# Altium PCB 795540071NUCLEO-DG_V3.PcbDoc (part 2 of 2)
Units mm, origin at the board's own origin, x right, y up, seen from the top; angles counter-clockwise.
Board outline 74.51 x 73.97 mm, 2 copper layers (Top Layer, Bottom Layer); 62 components, 85 nets, 350 pads, 246 vias.
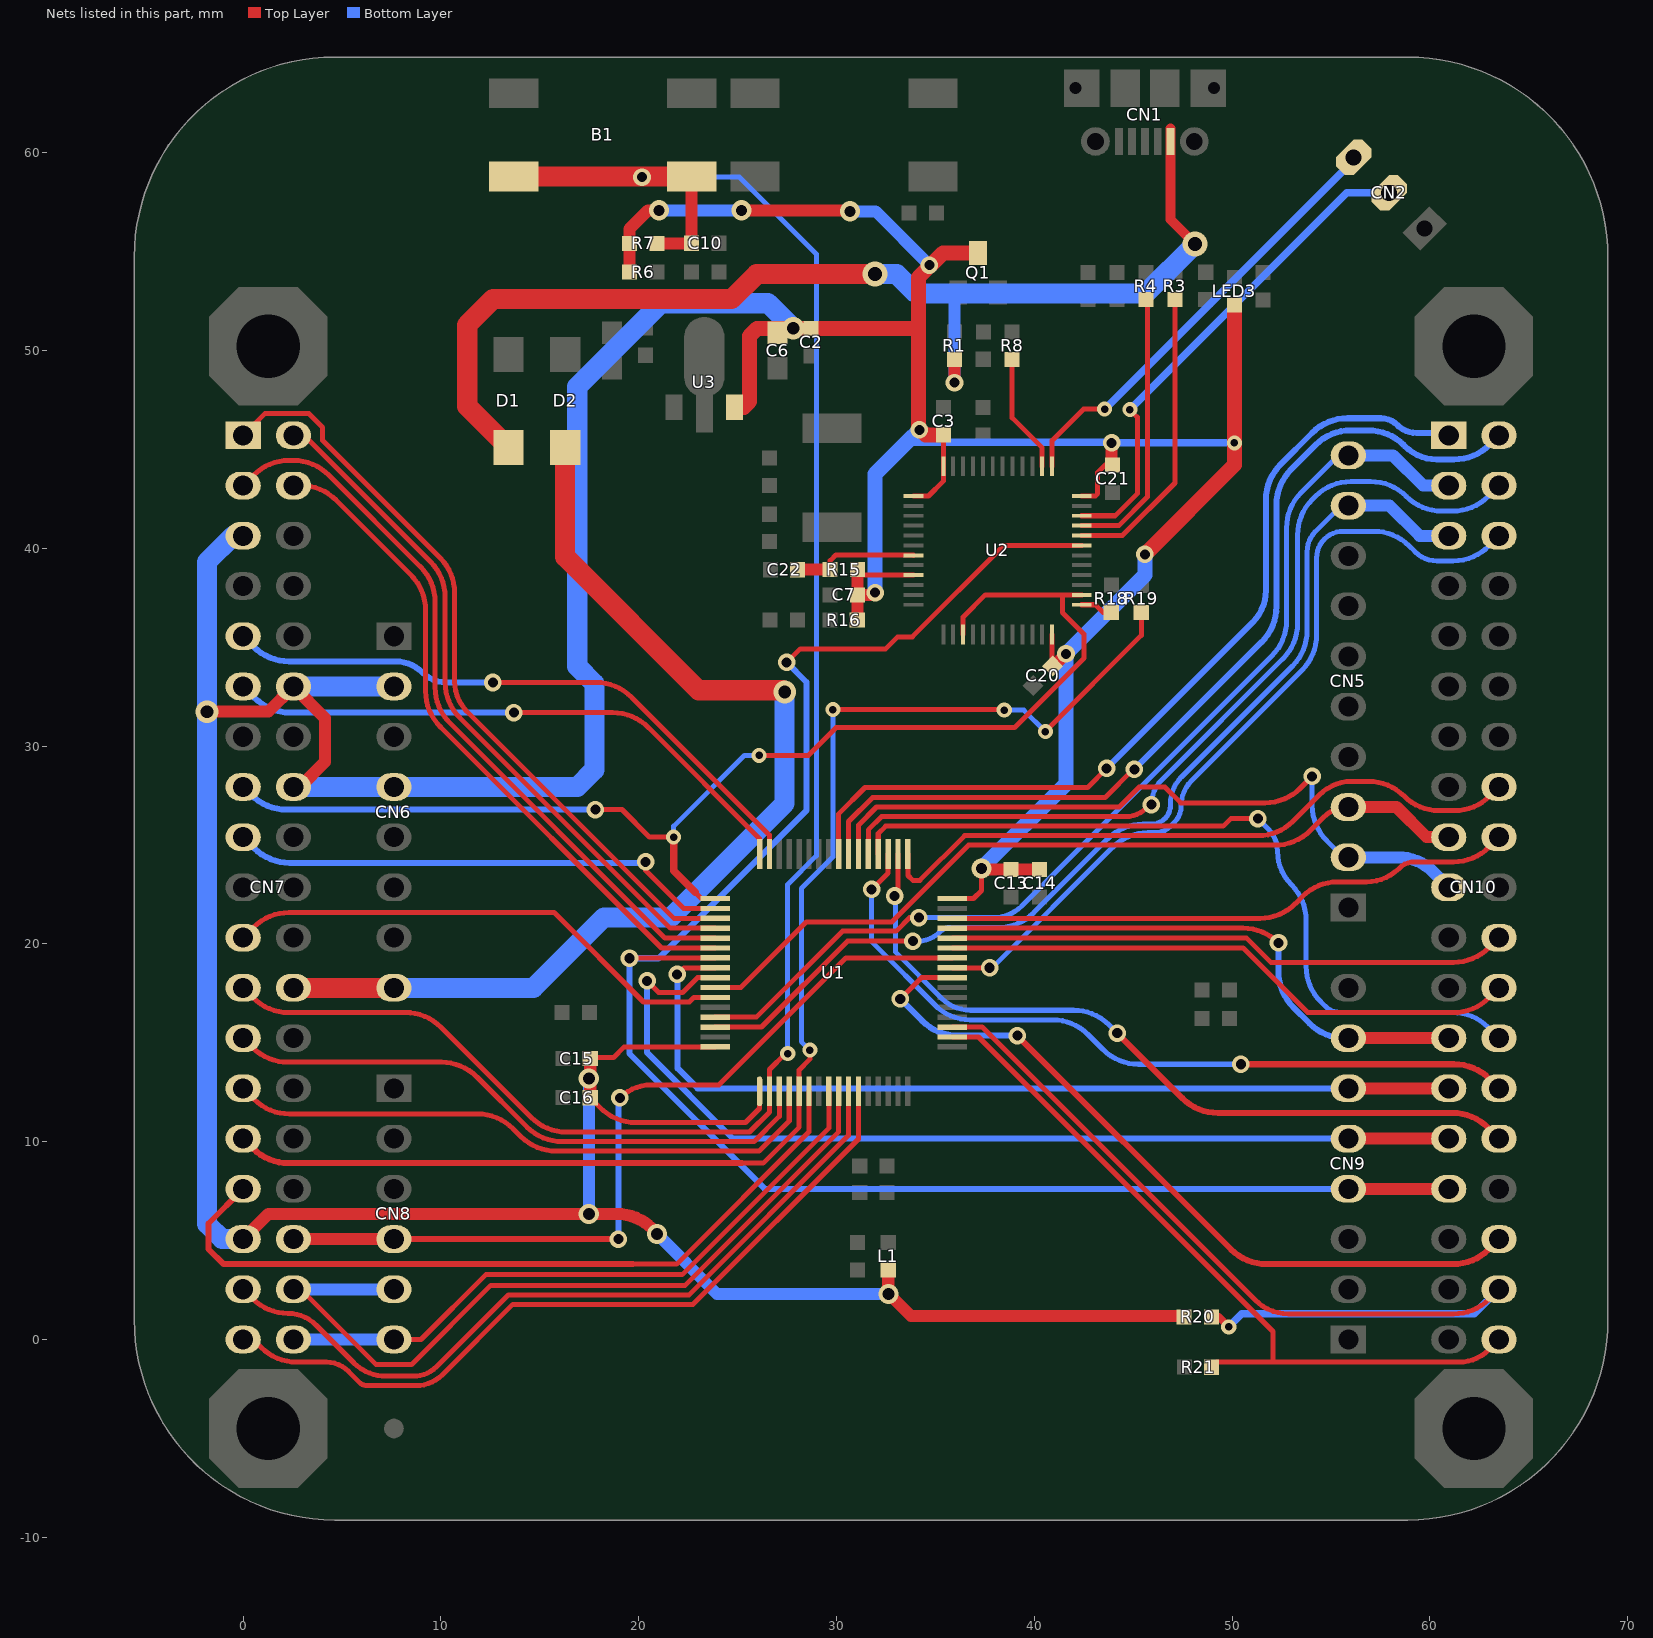
[diagram p2: the nets of this part, all layers, seen from the top]

## Via types
v1: diameter 0.61, hole 0.305, Top Layer to Bottom Layer, 118 vias
v2: diameter 0.889, hole 0.508, Top Layer to Bottom Layer, 62 vias
v3: diameter 0.762, hole 0.381, Top Layer to Bottom Layer, 40 vias
v4: diameter 1.016, hole 0.559, Top Layer to Bottom Layer, 7 vias
v5: diameter 1.016, hole 0.61, Top Layer to Bottom Layer, 6 vias
v6: diameter 0.66, hole 0.33, Top Layer to Bottom Layer, 4 vias
v7: diameter 1.143, hole 0.635, Top Layer to Bottom Layer, 3 vias
v8: diameter 0.66, hole 0.381, Top Layer to Bottom Layer, 3 vias
v9: diameter 1.27, hole 0.711, Top Layer to Bottom Layer, 3 vias

## Nets (pads, with @x,y where several pads share a name; then routed paths per layer and width w, separated by ;. In a path a pad name is that pad's centre, name@x,y a point inside that pad or via, vN(x,y) a via of type N, cw(c..) or ccw(c..) an arc to the next point about the centre after c; other vN are vias at no path point) (continued)
PA14: CN7.15 U1.49 U2.15 U2.26 | length 62.7
  Top Layer w0.254: v2(17.805,26.797) 19.152,26.797 20.549,25.4 v3(21.768,25.4) ; 22.86,22.606 23.168,22.298 U1.49@23.861,22.298 ; v3(26.086,29.54) 28.582,29.54 29.979,30.937 39.003,30.937 42.52,34.454 42.52,35.662 41.427,36.754 41.427,37.653 ; U2.15@36.401,35.653 36.401,36.528 37.526,37.653 41.427,37.653 ; U2.26@42.401,37.653 41.427,37.653
  Top Layer w0.381: v3(21.768,25.4) 21.768,23.698 22.86,22.606
  Bottom Layer w0.254: v3(21.768,25.4) 21.768,25.959 25.349,29.54 v3(26.086,29.54)
  Bottom Layer w0.305: CN7.15@0.165,27.775 0.399,27.541 ccw(c2.195,29.337) 2.195,26.797 v2(17.805,26.797)
PA15: CN7.17 U1.50 | length 25.5
  Top Layer w0.254: v2(20.345,24.155) 20.345,23.724 22.271,21.798 U1.50@23.861,21.798
  Bottom Layer w0.305: CN7.17@0,25.4 0.551,24.849 ccw(c2.348,26.645) 2.348,24.105 20.295,24.105 v2(20.345,24.155)
PB0: CN7.34 CN8.4 U1.26 | length 43.2
  Top Layer w0.254: v2(19.05,12.217) cw(c20.644,10.623) 20.644,12.878 24.057,12.878 30.477,19.298 U1.26@35.861,19.298
  Top Layer w0.305: CN8.4@7.62,5.08 v2(18.974,5.08)
  Top Layer w0.61: CN7.34@2.54,5.08 CN8.4@7.62,5.08
  Bottom Layer w0.305: v2(18.974,5.08) 18.974,12.141 v2(19.05,12.217)
PB1: CN10.24 U1.27 | length 29.4
  Top Layer w0.254: U1.27@35.861,19.798 50.56,19.798 53.823,16.535 61.203,16.535 ccw(c61.203,19.075) 62.999,17.279 CN10.24@63.5,17.78
PB2: CN10.22 U1.28 | length 28.6
  Top Layer w0.254: U1.28@35.861,20.298 50.743,20.298 51.965,19.075 61.203,19.075 ccw(c61.203,21.615) 62.999,19.819 CN10.22@63.5,20.32
PB3: CN9.4 CN10.31 U1.55 U2.31 | length 90.7
  Top Layer w0.254: v2(19.533,19.279) 19.552,19.298 U1.55@23.861,19.298 ; v2(27.483,34.239) 28.169,34.925 32.487,34.925 33.096,35.535 33.833,35.535 38.452,40.153 U2.31@42.401,40.153
  Top Layer w0.61: CN9.4@55.88,7.62 CN10.31@60.96,7.62
  Bottom Layer w0.305: v2(27.483,34.239) 28.473,33.249 28.473,26.746 21.006,19.279 v2(19.533,19.279) 19.533,14.453 26.365,7.62 CN9.4@55.88,7.62
PB4: CN9.6 CN10.27 U1.56 | length 46.2
  Top Layer w0.254: v2(21.946,18.466) 22.277,18.798 U1.56@23.861,18.798
  Top Layer w0.61: CN9.6@55.88,12.7 CN10.27@60.96,12.7
  Bottom Layer w0.305: v2(21.946,18.466) 21.971,18.44 21.971,13.708 22.979,12.7 CN9.6@55.88,12.7
PB5: CN9.5 CN10.29 U1.57 | length 50
  Top Layer w0.254: v2(20.422,18.136) 21.006,17.551 22.225,17.551 22.971,18.298 U1.57@23.861,18.298
  Top Layer w0.61: CN9.5@55.88,10.16 CN10.29@60.96,10.16
  Bottom Layer w0.305: v2(20.422,18.136) 20.422,14.503 24.765,10.16 CN9.5@55.88,10.16
PB6: CN5.3 CN10.17 U1.58 | length 41.3
  Top Layer w0.254: U1.58@23.861,17.798 25.164,17.798 28.473,21.107 32.791,21.107 36.678,24.994 52.161,24.994 ccw(c52.161,27.534) 53.957,25.738 54.623,26.403 cw(c55.88,25.146) CN5.3@55.88,26.924
  Top Layer w0.61: CN5.3@55.88,26.924 58.318,26.924 59.842,25.4 CN10.17@60.96,25.4
PB7: CN7.21 U1.59 | length 26.2
  Top Layer w0.254: CN7.21@0,20.32 0.526,20.846 cw(c2.322,19.05) 2.322,21.59 15.723,21.59 20.244,17.069 22.559,17.069 22.787,17.298 U1.59@23.861,17.298
PB8: CN5.10 CN10.3 U1.61 | length 53.1
  Top Layer w0.254: U1.61@23.861,16.298 25.95,16.298 30.302,20.65 33.017,20.65 33.702,21.336 v2(34.163,21.336)
  Bottom Layer w0.254: v2(34.163,21.336) 37.942,21.336 ccw(c37.942,23.374) 39.382,21.932 52.012,34.562 ccw(c50.216,36.358) 52.756,36.358 52.756,41.036 cw(c55.296,41.036) 53.5,42.832 55.013,44.345 cw(c55.88,43.478) CN5.10@55.88,44.704
  Bottom Layer w0.61: CN5.10@55.88,44.704 58.141,44.704 59.665,43.18 CN10.3@60.96,43.18
PB9: CN5.9 CN10.5 U1.62 | length 52
  Top Layer w0.254: U1.62@23.861,15.798 26.212,15.798 30.556,20.142 v2(33.858,20.142)
  Bottom Layer w0.254: v2(33.858,20.142) 34.09,20.142 ccw(c34.09,21.79) 35.255,20.625 cw(c35.755,20.125) 35.755,20.832 38.169,20.832 ccw(c38.169,23.372) 39.965,21.576 43.706,25.316 cw(c45.502,23.52) 45.502,26.06 45.934,26.06 ccw(c45.934,27.014) 46.608,26.339 ; 46.61,26.341 ccw(c45.934,27.014) 46.888,27.014 46.888,27.102 cw(c48.789,27.102) 46.976,27.672 cw(c48.789,27.102) 47.445,28.446 53.053,34.054 ccw(c51.257,35.85) 53.797,35.85 53.797,39.827 cw(c55.269,39.827) 54.228,40.868 55.273,41.913 cw(c55.88,41.306) CN5.9@55.88,42.164
  Bottom Layer w0.61: CN5.9@55.88,42.164 57.963,42.164 59.487,40.64 CN10.5@60.96,40.64
PB10: CN9.7 CN10.25 U1.29 | length 28.5
  Top Layer w0.254: U1.29@35.861,20.798 50.559,20.798 cw(c50.559,18.266) v2(52.349,20.056)
  Top Layer w0.61: CN9.7@55.88,15.24 CN10.25@60.96,15.24
  Bottom Layer w0.305: v2(52.349,20.056) 52.349,18.604 ccw(c54.889,18.604) 53.093,16.807 53.917,15.984 ccw(c55.713,17.78) 55.713,15.24 CN9.7@55.88,15.24
PB11: CN10.18 U1.30 | length 28.5
  Top Layer w0.254: U1.30@35.861,21.298 51.411,21.298 ccw(c51.411,23.838) 53.207,22.042 53.581,22.415 cw(c55.329,20.668) 55.329,23.139 56.79,23.139 ccw(c56.79,25.481) 58.445,23.825 cw(c59.243,23.028) 59.243,24.155 61.203,24.155 ccw(c61.203,26.695) 62.999,24.899 CN10.18@63.246,25.146
PB12: CN10.16 U1.33 | length 33.5
  Top Layer w0.254: U1.33@33.611,24.548 33.611,23.463 33.858,23.216 34.217,23.216 36.478,25.476 51.333,25.476 ccw(c51.333,27.929) 53.068,26.195 54.407,27.534 cw(c56.062,25.878) 56.062,28.219 56.905,28.219 cw(c56.905,25.679) 58.701,27.475 ccw(c60.461,29.236) 60.461,26.746 61.254,26.746 ccw(c61.254,29.286) 63.05,27.49 CN10.16@63.322,27.762
PB13: CN10.30 U1.34 | length 39
  Top Layer w0.254: v2(32.944,22.428) 33.111,22.596 U1.34@33.111,24.548
  Top Layer w0.305: v2(44.196,15.494) 47.491,12.199 ccw(c49.287,13.995) 49.287,11.455 61.152,11.455 cw(c61.152,8.915) 62.949,10.711 CN10.30@63.5,10.16
  Bottom Layer w0.254: v2(32.944,22.428) 32.974,22.398 32.974,19.601 35.33,17.245 ccw(c36.767,18.682) 36.767,16.65 41.988,16.65 cw(c41.988,14.11) 43.137,16.375 cw(c41.988,14.11) 43.784,15.906 v2(44.196,15.494)
PB14: CN10.28 U1.35 | length 39.5
  Top Layer w0.254: v2(31.775,22.758) 32.611,23.594 U1.35@32.611,24.548 U1.35@32.602,24.538
  Top Layer w0.305: v2(50.444,13.919) 61.229,13.919 cw(c61.229,11.379) 63.025,13.175 CN10.28@63.5,12.7
  Bottom Layer w0.254: v2(31.775,22.758) 31.775,20.117 35.129,16.763 ; 34.893,16.986 34.968,16.911 ccw(c36.764,18.707) 35.129,16.763 ; v2(50.444,13.919) 45.274,13.919 cw(c45.274,16.459) 43.477,14.663 42.717,15.423 ccw(c40.921,13.627) 40.921,16.167 36.764,16.167 cw(c36.764,18.707) 35.129,16.763
PB15: CN10.26 U1.36 | length 40.4
  Top Layer w0.254: U1.36@32.111,24.548 32.111,25.583 32.487,25.959 49.555,25.959 49.936,26.34 v2(51.308,26.34)
  Bottom Layer w0.254: v2(51.308,26.34) 51.835,25.813 cw(c50.716,24.694) 52.299,24.694 ccw(c54.702,24.694) 53.002,22.994 cw(c51.206,21.198) 53.746,21.198 53.746,18.868 ccw(c56.286,18.868) 54.49,17.072 54.706,16.856 ccw(c55.48,17.63) 55.48,16.535 61.152,16.535 cw(c61.152,13.995) 62.949,15.791 CN10.26@63.5,15.24
PC0: CN7.38 CN8.6 U1.8 | length 33.4
  Top Layer w0.254: CN8.6@7.62,0 8.992,0 12.268,3.277 22.2,3.277 29.611,10.688 U1.8@29.611,12.548
  Bottom Layer w0.61: CN7.38@2.54,0 CN8.6@7.62,0
PC1: CN7.36 CN8.5 U1.9 | length 41.1
  Top Layer w0.254: CN7.36@2.54,2.54 2.914,2.54 6.724,-1.27 8.509,-1.27 12.522,2.743 22.349,2.743 30.111,10.506 U1.9@30.111,12.548
  Bottom Layer w0.61: CN7.36@2.54,2.54 CN8.5@7.62,2.54
PC2: CN7.35 U1.10 | length 38.9
  Top Layer w0.254: CN7.35@0.318,2.222 0.475,2.065 ccw(c2.271,3.861) 2.271,1.321 cw(c2.271,-0.668) 3.678,0.738 5.599,-1.183 ccw(c7.22,0.438) 6.403,-1.704 ccw(c7.22,0.438) 7.22,-1.854 8.614,-1.854 ccw(c8.614,-0.206) 8.95,-1.82 ccw(c8.614,-0.206) 9.779,-1.372 13.411,2.261 22.549,2.261 30.611,10.323 U1.10@30.611,12.548
PC3: CN7.37 U1.11 | length 39.4
  Top Layer w0.254: CN7.37@0,0 0.508,0 0.907,-0.399 ccw(c2.703,1.397) 2.703,-1.143 4.2,-1.143 cw(c4.2,-2.716) 5.312,-1.604 5.867,-2.159 ccw(c6.297,-1.73) 6.273,-2.336 ccw(c6.297,-1.73) 6.297,-2.337 8.712,-2.337 ccw(c8.712,-0.381) 10.095,-1.764 13.637,1.778 22.748,1.778 31.111,10.141 U1.11@31.111,12.548
PC4: CN10.34 U1.24 | length 39.1
  Top Layer w0.254: v2(33.223,17.221) 34.3,18.298 U1.24@35.861,18.298
  Top Layer w0.305: v2(39.141,15.367) 49.954,4.554 ccw(c51.751,6.35) 51.751,3.81 61.178,3.81 ccw(c61.178,6.35) 62.974,4.554 CN10.34@63.5,5.08
  Bottom Layer w0.305: v2(33.223,17.221) 34.333,16.111 ccw(c36.13,17.907) 36.13,15.367 v2(39.141,15.367)
PC5: CN10.6 U1.25 | length 41.1
  Top Layer w0.254: U1.25@35.861,18.798 v2(37.743,18.798)
  Bottom Layer w0.254: v2(37.743,18.798) 37.873,18.798 43.96,24.885 cw(c45.756,23.089) 45.756,25.629 46.109,25.629 ccw(c46.109,26.713) 46.876,25.946 47.09,26.16 ; 47.09,26.161 ccw(c46.287,26.962) 47.422,26.962 cw(c49.268,26.962) 47.507,27.518 cw(c49.268,26.962) 47.962,28.267 53.536,33.841 ccw(c51.74,35.637) 54.28,35.637 54.28,39.524 cw(c55.624,39.524) 54.673,40.475 cw(c55.624,39.524) 55.624,40.869 57.175,40.869 cw(c57.175,38.354) 58.953,40.132 59.258,39.827 ; 59.259,39.826 ccw(c60.362,40.931) 60.362,39.37 61.178,39.37 ccw(c61.178,41.91) 62.229,39.598 ccw(c61.178,41.91) 62.974,40.114 CN10.6@63.5,40.64
PC6: CN10.4 U1.37 | length 45
  Top Layer w0.254: U1.37@31.611,24.548 31.611,25.769 32.283,26.441 44.628,26.441 ccw(c44.628,27.913) 45.668,26.872 v2@45.847,27.051
  Bottom Layer w0.254: v2(45.923,27.051) cw(c47.66,27.051) 45.945,27.327 cw(c47.66,27.051) 46.432,28.279 52.571,34.418 ccw(c50.775,36.214) 53.315,36.214 53.315,40.68 cw(c55.855,40.68) 54.059,42.476 54.222,42.639 cw(c56.018,40.843) 56.018,43.383 57.012,43.383 cw(c57.012,40.843) 58.808,42.639 58.819,42.629 ccw(c60.615,44.425) 60.615,41.885 61.152,41.885 ccw(c61.152,44.425) 62.949,42.629 CN10.4@63.5,43.18
PC7: CN5.2 CN10.19 U1.38 | length 36.5
  Top Layer w0.254: U1.38@31.111,24.548 31.111,26.009 32.026,26.924 44.293,26.924 45.309,27.94 46.601,27.94 47.401,27.14 51.666,27.14 ccw(c51.666,29.68) 53.462,27.884 v2(54.051,28.473)
  Bottom Layer w0.254: v2(54.051,28.473) 54.051,27.011 ccw(c56.591,27.011) 54.795,25.215 55.626,24.384 CN5.2@55.88,24.384
  Bottom Layer w0.61: CN5.2@55.88,24.384 58.384,24.384 cw(c58.384,21.844) 60.18,23.64 CN10.19@60.96,22.86
PC8: CN10.2 U1.39 | length 47.4
  Top Layer w0.254: U1.39@30.611,24.548 30.611,26.192 31.826,27.407 43.586,27.407 45.009,28.829 v2(45.06,28.829)
  Bottom Layer w0.305: v2(45.06,28.829) 51.504,35.273 ccw(c49.708,37.069) 52.248,37.069 52.248,42.204 cw(c54.788,42.204) 52.992,44 54.229,45.237 cw(c56.007,43.459) 54.23,45.238 cw(c56.007,43.459) 56.007,45.974 56.885,45.974 cw(c56.885,43.434) 58.681,45.23 58.746,45.165 ccw(c60.35,46.77) 60.35,44.501 61.229,44.501 ccw(c61.229,47.041) 63.025,45.245 CN10.2@63.5,45.72
PC9: CN10.1 U1.40 | length 44.9
  Top Layer w0.254: U1.40@30.111,24.548 30.111,26.581 31.445,27.915 42.697,27.915 v2(43.663,28.88)
  Bottom Layer w0.305: v2(43.663,28.88) 51.041,36.258 ccw(c49.416,37.884) 51.714,37.884 51.714,42.458 cw(c54.254,42.458) 52.458,44.254 54.044,45.84 cw(c55.84,44.044) 55.84,46.584 57.522,46.584 cw(c57.522,45.383) 58.371,46.232 ccw(c59.318,47.179) 58.428,46.178 ccw(c59.318,47.179) 58.646,46.02 ccw(c59.318,47.179) 59.318,45.84 60.671,45.84 cw(c60.671,45.431) CN10.1@60.96,45.72
PC10: CN7.1 U1.51 | length 38.6
  Top Layer w0.254: CN7.1@0.14,45.86 1.092,46.812 3.327,46.812 4.013,46.126 4.013,45.467 4.954,44.527 9.949,39.531 cw(c8.153,37.735) 10.693,37.735 10.693,33.277 ccw(c12.856,33.277) 11.326,31.749 ; 11.327,31.748 21.778,21.298 U1.51@23.861,21.298
PC11: CN7.2 U1.52 | length 35
  Top Layer w0.254: CN7.2@2.794,45.72 3.15,45.72 ccw(c3.323,45.72) CN7.2@3.2,45.598 ; CN7.2@3.2,45.597 9.467,39.331 cw(c7.671,37.535) 10.211,37.535 10.211,33.234 ccw(c12.751,33.234) 10.955,31.438 21.595,20.798 U1.52@23.861,20.798
PC12: CN7.3 U1.53 | length 37.4
  Top Layer w0.254: CN7.3@0.229,43.409 0.526,43.706 cw(c2.322,41.91) 2.322,44.45 2.538,44.45 cw(c2.538,41.91) 4.334,43.706 8.959,39.082 cw(c7.163,37.286) 9.703,37.286 9.703,32.98 ccw(c12.243,32.98) 10.447,31.184 21.333,20.298 U1.53@23.861,20.298
PC13: B1.2 C10.2 CN7.23 R7.1 U1.2 | length 98.4
  Top Layer w0.254: CN7.23@0.191,17.59 0.501,17.279 ccw(c2.297,19.075) 2.297,16.535 8.204,16.535 cw(c8.204,13.995) 10,15.791 14.557,11.234 ccw(c16.353,13.03) 16.353,10.49 25.603,10.49 26.611,11.498 U1.2@26.611,12.548 26.611,13.657 27.407,14.453 v3(27.534,14.453)
  Top Layer w0.61: R7.1@20.916,55.425 C10.2@22.657,55.425 ; C10.2@22.666,55.434 B1.2@22.666,58.789
  Top Layer w1.016: B1.2@13.686,58.809 B1.2@22.686,58.809
  Bottom Layer w0.254: v2@20.371,58.776 25.095,58.776 28.981,54.889 28.981,24.46 27.534,23.012 v3(27.534,14.453)
  Bottom Layer w0.305: v2(20.168,58.776) v2@20.371,58.776
PC14: CN7.25 U1.3 | length 30.7
  Top Layer w0.254: CN7.25@0,15.24 0.475,14.765 ccw(c2.271,16.561) 2.271,14.021 10.022,14.021 cw(c10.022,11.481) 11.818,13.277 14.344,10.752 ccw(c16.14,12.548) 16.14,10.008 25.832,10.008 27.111,11.287 U1.3@27.111,12.548
PC15: CN7.27 U1.4 | length 30.3
  Top Layer w0.254: CN7.27@0.33,12.37 0.551,12.149 ccw(c2.348,13.945) 2.348,11.405 11.851,11.405 cw(c11.851,8.865) 13.647,10.661 14.039,10.269 ccw(c15.835,12.065) 15.835,9.525 26.086,9.525 27.611,11.05 U1.4@27.611,12.548
PD2: CN7.4 U1.54 | length 34.3
  Top Layer w0.254: CN7.4@2.54,43.18 2.921,43.18 cw(c2.921,40.666) 4.698,42.445 cw(c2.921,40.666) 4.699,42.444 8.476,38.666 cw(c6.68,36.87) 9.22,36.87 9.22,32.78 ccw(c11.76,32.78) 9.964,30.984 21.151,19.798 U1.54@23.861,19.798
PF0: CN7.29 R19.2 U1.5 | length 70.7
  Top Layer w0.254: 25.222,8.915 26.289,8.915 28.111,10.738 U1.5@28.111,12.548 28.111,13.633 28.651,14.173 v3(28.651,14.63) ; v3(29.82,31.852) v3@38.456,31.852 ; v3(40.564,30.734) 40.564,30.759 45.411,35.607 R19.2@45.411,36.753
  Top Layer w0.305: CN7.29@0,10.16 0.501,9.659 ccw(c2.297,11.455) 2.297,8.915 25.222,8.915
  Bottom Layer w0.254: v3(28.651,14.63) 28.219,15.062 28.219,22.809 29.82,24.409 v3(29.82,31.852) ; v3(38.481,31.826) 39.472,31.826 v3(40.564,30.734)
PF1: CN7.31 U1.6 | length 39.3
  Top Layer w0.254: 19.71,3.81 21.92,3.81 28.611,10.501 U1.6@28.611,12.548
  Top Layer w0.305: CN7.31@0,7.62 -1.753,5.867 -1.753,4.572 -0.991,3.81 19.71,3.81
PF4: CN10.38 R21.2 U1.18 | length 38.5
  Top Layer w0.254: U1.18@35.861,15.298 37.179,15.298 52.07,0.406 52.07,-1.144 ; R21.2@48.972,-1.401 49.228,-1.144 52.07,-1.144 ; CN10.38@62.982,-0.518 cw(c61.468,0.998) 61.468,-1.144 52.07,-1.144 ; CN10.38@62.983,-0.517 CN10.38@63.195,-0.305
PF5: CN10.36 R20.1 U1.19 | length 49.5
  Top Layer w0.254: U1.19@35.861,15.798 37.365,15.798 51.168,1.994 ccw(c52.855,3.68) 52.855,1.295 61.203,1.295 ccw(c61.203,3.835) 62.999,2.039 CN10.36@63.5,2.54
  Top Layer w0.381: R20.1@48.959,1.145 49.325,1.145 v3(49.835,0.635)
  Bottom Layer w0.381: v3(49.835,0.635) 50.495,1.295 62.255,1.295 CN10.36@63.5,2.54
PF6: CN7.9 U1.47 | length 32.2
  Top Layer w0.254: v2(12.624,33.223) 17.842,33.223 cw(c17.842,30.683) 19.638,32.479 26.602,25.516 ; 26.602,25.516 26.602,24.557 U1.47@26.611,24.548 26.611,25.506 26.602,25.516
  Bottom Layer w0.305: CN7.9@0.279,35.281 0.526,35.034 ccw(c2.322,36.83) 2.322,34.29 7.701,34.29 cw(c7.701,32.339) 9.08,33.719 ccw(c10.276,34.914) 10.276,33.223 v2(12.624,33.223) ; v2@12.548,33.147 v2@12.7,32.995
PF7: CN7.11 U1.48 | length 29.1
  Top Layer w0.254: v2(13.691,31.699) 18.684,31.699 cw(c18.684,29.159) 20.48,30.955 26.111,25.324 U1.48@26.111,24.943
  Bottom Layer w0.305: CN7.11@0.241,32.779 0.577,32.443 ccw(c2.373,34.239) 2.373,31.699 v2(13.691,31.699)
STM_JTCK: CN2.3 U2.37 | length 22.6
  Top Layer w0.254: U2.37@40.901,44.153 40.901,45.447 42.494,47.041 v3(43.561,47.041)
  Bottom Layer w0.381: v3(43.561,47.041) 56.149,59.628 CN2.3@56.149,59.777
STM_JTMS: CN2.2 U2.34 | length 25.3
  Top Layer w0.254: U2.34@42.401,41.653 44.092,41.653 45.212,42.774 45.212,46.634 v3(44.831,47.015)
  Bottom Layer w0.381: v3(44.831,47.015) 55.796,57.981 CN2.2@57.945,57.981
STM_RST: C22.1 R15.1 U2.7 | length 6.4
  Top Layer w0.254: R15.1@29.68,38.936 29.68,39.383 29.968,39.671 31.593,39.671 ; 31.593,39.671 33.883,39.671 U2.7@33.901,39.653
  Top Layer w0.61: C22.1@28.038,38.922 28.052,38.936 R15.1@29.68,38.936
T_SWDIO_IN: R18.1@43.893,36.767 U2.25 | length 1.7
  Top Layer w0.254: U2.25@42.401,37.153 43.085,37.153 43.472,36.767 R18.1@43.893,36.767
U5V: CN1.1 D1.A R1.2 | length 58.5
  Top Layer w0.508: CN1.1@46.893,61.244 CN1.1@46.893,60.579 46.893,56.637 v9(48.133,55.397)
  Top Layer w0.61: v2@35.963,48.391 R1.2@35.963,49.555
  Top Layer w1.016: D1.A@13.411,45.108 11.328,47.191 11.328,51.308 12.624,52.603 24.691,52.603 25.961,53.873 v9(31.953,53.873)
  Bottom Layer w0.61: v2(35.966,48.387) 35.966,52.756 36.093,52.883
  Bottom Layer w1.016: v9(31.953,53.873) 33.045,53.873 34.036,52.883 36.093,52.883 45.618,52.883 v9(48.133,55.397)
USB_DM: R3.2 U2.32 | length 15.1
  Top Layer w0.254: U2.32@42.401,40.653 44.457,40.653 47.113,43.31 R3.2@47.113,52.577
USB_DP: R4.2 U2.33 | length 13.9
  Top Layer w0.254: U2.33@42.401,41.153 44.274,41.153 45.72,42.599 45.72,52.506 R4.2@45.648,52.577
USB_RENUMN: R8.2 U2.38 | length 6
  Top Layer w0.254: R8.2@38.884,49.555 38.884,46.61 40.401,45.092 U2.38@40.401,44.153
VDD: C2.1 C3.1 C6.1 C7.1 C13.1 C14.1 C15.1 C16.1 C20.1 C21.1 CN6.2 CN6.4 CN7.5 CN7.12 CN7.16 CN7.33 L1.1 LED3.A Q1.C R6.2 R7.2 R15.2 R16.1 R20.2 U1.1 U1.32 U1.64 U2.1 U2.9 U2.24 U2.36 U2.48 U3.3 | length 306.7
  Top Layer w0.254: C15.1@17.335,14.249 18.72,14.249 19.268,14.798 U1.64@23.861,14.798 ; C16.1@17.512,12.227 C16.1@17.512,12.294 ; C16.1@17.548,12.227 18.058,11.717 ccw(c19.854,13.513) 19.854,10.973 25.403,10.973 26.111,11.681 U1.1@26.111,12.548 ; R15.2@31.065,38.934 31.346,38.653 U2.9@33.901,38.653 ; U2.1@33.901,42.653 34.652,42.653 35.401,43.402 U2.48@35.401,44.153 C3.1@35.401,45.733 ; U1.32@35.861,22.298 36.928,22.298 37.338,22.708 v4(37.338,23.825) ; U2.24@40.901,35.653 40.901,34.069 C20.1@40.923,34.047 ; U2.36@42.401,42.653 43.085,42.653 43.205,42.774 43.205,43.84 43.583,44.218 C21.1@43.958,44.218
  Top Layer w0.61: v7(-1.829,31.75) 1.27,31.75 CN7.12@2.54,33.02 4.14,31.42 4.14,29.21 2.87,27.94 CN7.16@2.54,27.94 ; CN7.33@0,5.08 1.27,6.35 v5(17.475,6.35) 18.887,6.35 cw(c18.887,3.81) 20.683,5.606 v5@20.904,5.385 ; C16.1@17.512,12.294 17.548,12.33 C15.1@17.548,14.208 ; R6.2@19.532,53.979 R7.2@19.532,55.427 19.532,56.159 20.472,57.099 v4(21.031,57.099) ; v4(25.197,57.099) v4@30.632,57.099 ; R16.1@31.051,36.375 31.065,36.389 C7.1@31.065,37.652 ; C7.1@31.061,37.652 C7.1@31.065,37.652 ; R15.2@31.065,38.934 C7.1@31.065,37.652 ; v2(31.953,37.77) 31.835,37.652 C7.1@31.065,37.652 ; v5@32.616,2.335 L1.1@32.616,3.518 ; v5(32.639,2.311) 33.757,1.194 47.575,1.194 R20.2@47.575,1.147 ; v4(37.338,23.825) 37.392,23.771 C13.1@38.827,23.771 C14.1@40.275,23.771 ; C20.1@40.923,34.047 40.981,34.047 v2(41.605,34.671) ; v2(43.917,45.339) 43.917,44.259 C21.1@43.958,44.218
  Top Layer w0.762: U3.3@24.841,47.139 25.32,47.139 25.603,47.422 25.603,50.749 25.981,51.127 C2.1@28.718,51.127 34.109,51.127 ; v4@30.632,56.997 v4(30.683,57.048) ; C3.1@35.401,45.733 34.509,45.733 34.138,46.105 34.138,53.696 35.382,54.94 Q1.C@37.15,54.94 ; v2(45.593,39.7) 50.114,44.221 v3(50.114,45.339) 50.114,52.312 LED3.A@50.118,52.315
  Bottom Layer w0.381: 33.617,45.428 33.68,45.364 43.891,45.364 v2(43.917,45.339) v3(50.114,45.339)
  Bottom Layer w0.61: v5(17.475,6.35) v5(17.475,13.208) ; v5(20.93,5.334) 23.952,2.311 v5(32.639,2.311) ; v4(21.031,57.099) v4(25.197,57.099) ; v4(30.683,57.048) 31.979,57.048 v2(34.696,54.331)
  Bottom Layer w0.762: v2(31.953,37.77) 31.953,43.764 33.617,45.428 v2(34.188,45.999) ; v4(37.338,23.825) 41.605,28.092 v2(41.605,34.671) 45.593,38.659 v2(45.593,39.7)
  Bottom Layer w1.016: CN7.33@0,5.08 -1.067,5.08 -1.829,5.842 v7(-1.829,31.75) -1.829,39.319 -0.508,40.64 CN7.5@0,40.64 ; CN7.16@2.54,27.94 CN6.4@7.62,27.94 16.891,27.94 17.755,28.804 17.755,33.172 16.891,34.036 16.891,48.184 21.107,52.4 26.543,52.4 v7(27.813,51.13) ; CN7.12@2.54,33.02 CN6.2@7.62,33.02
VIN: CN6.8 CN7.24 D2.A | length 53.8
  Top Layer w1.016: CN7.24@2.54,17.78 CN6.8@7.62,17.78 ; D2.A@16.281,45.108 16.281,39.573 23.025,32.829 27.292,32.829 v7(27.381,32.741)
  Bottom Layer w1.016: CN6.8@7.62,17.78 14.681,17.78 18.237,21.336 21.615,21.336 27.381,27.102 v7(27.381,32.741)
pads on no net: CN6.1 CN7.10 CN7.26 CN10.10 U2.3 U2.4 U2.11 U2.14 U2.16 U2.17 U2.19 U2.21 U2.22 U2.28 U2.40 U2.41 U2.42 U2.43 U2.45 U2.46
copper on no net:
  other v1: 22.504,39.878

## Polygon pours and split planes (outlines as drawn)
GND on Top Layer "Top Layer-No Net" (hatched 45Degree grid 0.508 track 0.508, remove dead copper, pour order 8): 3.023,64.186 3.302,63.906 34.519,63.906 61.798,63.906 64.084,61.62 64.364,61.341 65.1,61.341 66.878,59.563 67.564,58.877 67.564,58.014 67.564,57.226 68.377,56.413 68.428,56.363 68.428,44.755 68.428,-2.667 66.015,-5.08 64.11,-6.985 63.348,-6.985 62.662,-6.985 61.519,-8.128 61.29,-8.357 4.064,-8.357 2.057,-8.357 1.829,-8.128 1.372,-7.671 0.686,-7.671 0.025,-7.671 -1.194,-6.452 -3.251,-4.394 -3.251,-3.886 -3.251,-3.175 -4.013,-2.413 -4.75,-1.676 -4.75,-0.279 -4.75,56.54 -4.242,57.048 -3.785,57.506 -3.785,58.776 -3.785,59.461 -2.413,60.833 -0.889,62.357 -0.178,62.357 0.635,63.17 1.372,63.906 3.429,63.906
U5V on Top Layer "Top Layer-No Net" (hatched 45Degree grid 0.508 track 0.508, remove dead copper, pour order 6): 46.685,59.436 46.787,59.334 46.787,56.363 46.787,55.829 47.65,54.966 47.676,54.991 49.505,54.991 49.505,56.109 48.87,56.744 47.396,58.217 47.396,59.69 46.812,59.69 46.761,59.741
GND on Bottom Layer "Top Layer-No Net" (hatched 45Degree grid 0.508 track 0.508, remove dead copper, pour order 12): 3.454,64.16 3.581,64.033 59.69,64.033 61.9,64.033 63.297,62.636 65.913,60.02 66.7,60.02 66.7,58.699 68.351,57.048 68.148,56.845 68.148,51.105 68.148,-1.6 67.386,-2.362 66.954,-2.794 66.954,-3.886 66.954,-3.988 63.449,-7.493 62.84,-8.103 59.436,-8.103 1.651,-8.103 1.524,-7.976 0.203,-6.655 -0.686,-6.655 -0.813,-6.655 -3.302,-4.166 -4.775,-2.692 -4.775,-1.346 -4.775,0 -4.826,0.051 -4.902,0.127 -4.902,56.21 -4.902,57.048 -4.064,57.887 -4.064,59.258 -4.064,59.411 -1.448,62.027 -0.762,62.713 0,62.713 1.321,62.713 2.438,63.83 2.718,64.11 3.327,64.11

## Keep-outs
Keep-Out Layer:
  lines w0.254: -5.38,1 ccw(c4.62,1) 4.62,-9 58.88,-9 ccw(c58.88,1) 68.88,1 68.88,54.72 ccw(c58.88,54.72) 58.88,64.72 4.62,64.72 ccw(c4.62,54.72) -5.38,54.72 ; -5.38,1.016 -5.38,54.736

## Silkscreen, mask and mechanical layers (free items; w line width, h text height)
Top Overlay:
  lines w0.254: -8.3,-7.516 -7.793,-9.041 ; -8.231,62.865 -7.722,64.389 ; -8.047,-9.04 -7.539,-9.041 ; -7.976,64.389 -7.468,64.389 ; -7.764,20.412 -7.793,-9.041 ; -7.75,34.936 -7.722,64.389 ; -7.284,-7.517 -7.793,-9.041 ; -7.215,62.865 -7.722,64.389 ; -4.953,-12.04 -4.953,-11.532 ; -3.429,-12.294 -4.953,-11.786 ; -3.429,-11.278 -4.953,-11.786 ; 4.064,25.4 5.969,25.4 ; 4.191,0 5.969,0 ; 4.191,2.54 5.842,2.54 ; 4.191,5.08 5.842,5.08 ; 4.191,7.62 5.969,7.62 ; 4.191,10.16 5.969,10.16 ; 4.191,12.7 5.08,12.7 ; 4.191,15.24 5.334,15.24 6.35,14.478 8.763,14.478 9.398,14.986 ; 4.191,17.78 5.969,17.78 ; 4.191,20.32 5.969,20.32 ; 4.191,22.86 5.969,22.86 ; 4.191,27.94 5.969,27.94 ; 4.191,30.48 5.969,30.48 ; 4.191,33.02 5.842,33.02 ; 24.257,-11.786 -4.953,-11.786 ; 40.051,-11.786 69.261,-11.786 ; 57.531,2.54 59.309,2.54 ; 57.531,5.08 59.309,5.08 ; 57.531,7.62 59.309,7.62 ; 57.531,10.16 59.309,10.16 ; 57.531,12.7 59.182,12.7 ; 57.531,15.24 59.182,15.24 ; 57.531,17.78 59.309,17.78 ; 57.531,26.924 59.309,25.4 ; 57.531,29.464 59.182,27.94 ; 57.531,32.131 59.182,30.48 ; 57.531,34.671 59.182,33.02 ; 57.582,47.701 58.877,47.701 59.36,47.066 ; 57.658,37.084 59.309,35.433 ; 57.658,39.624 59.309,37.973 ; 57.658,42.291 59.309,40.64 ; 57.658,44.831 59.309,43.18 ; 57.785,21.209 59.309,20.066 ; 57.785,24.511 59.436,22.86 ; 58.42,0 59.182,0 ; 67.737,-12.294 69.261,-11.786 ; 67.737,-11.278 69.261,-11.786 ; 69.261,-12.04 69.261,-11.532
  text "SCK" at 57.633,60.554 h2.03
  text "SDO" at 59.893,58.395 h2.03
  text "USER" at 12.344,56.54 h1
  text "RESET" at 26.086,56.54 h1
  text "GND" at 61.57,56.439 h2.03
  text "PC9" at 54.864,47.219 h1.02
  text "PC11" at 4.293,45.212 h1.02
  text "PC8" at 65.232,45.212 h1.02
  text "PB8" at 51.714,44.094 h1.02
  text "PC10" at -4.745,44.069 h1.02
  text "PC12" at -4.745,42.672 h1.02
  text "PD2" at 4.293,42.672 h1.02
  text "PC6" at 65.232,42.672 h1.02
  text "PB9" at 51.714,41.732 h1.02
  text "3V3" at -4.745,40.132 h1.02
  text "5V" at 4.293,40.132 h1.02
  text "PC5" at 65.232,40.132 h1.02
  text "AVDD" at 50.648,38.506 h1.02
  text "BOOT" at -4.745,37.592 h0.91
  text "U5V" at 65.232,37.592 h1.02
  text "GND" at 4.293,37.541 h1.02
  text "GND" at 51.435,36.449 h1.02
  text "PF6" at -4.745,35.052 h1.02
  text "NC" at 9.779,35.052 h1.02
  text "NC" at 65.232,35.052 h1.02
  text "SCK" at 48.235,33.934 h1.02
  text "PA5" at 51.435,33.909 h1.02
  text "3V3" at 9.449,32.563 h1.02
  text "PF7" at -4.745,32.512 h1.02
  text "PA12" at 65.232,32.512 h1.02
  text "MISO" at 48.285,31.42 h1.02
  text "PA6" at 51.587,31.42 h1.02
  text "PA13" at -4.745,29.972 h1.02
  text "PA11" at 65.232,29.972 h1.02
  text "NRST" at 9.652,29.718 h1.02
  text "PWM/MOSI/D11" at 40.869,29.515 h1.02
  text "PA7" at 50.927,29.489 h1.02
  text "PA14" at -4.745,27.432 h1.02
  text "3V3" at 9.652,27.432 h1.02
  text "PB12" at 65.232,27.432 h1.02
  text "PB6" at 51.994,25.73 h1.02
  text "PWM/CS/D10" at 41.478,25.349 h1.02
  text "PA15" at -4.745,24.892 h1.02
  text "PB11" at 65.232,24.892 h1.02
  text "5V" at 9.652,24.638 h1.02
  text "PWM/D9" at 45.226,23.749 h1.02
  text "PC7" at 51.435,23.749 h1.02
  text "GND" at -4.745,22.352 h1.02
  text "GND" at 65.232,22.352 h1.02
  text "GND" at 9.652,22.098 h1.02
  text "D8" at 49.062,21.209 h1.02
  text "PA9" at 51.483,21.209 h1.02
  text "73.43 (mm)" at -6.85,20.665 h1.52 r89.94
  text "PB2" at 65.253,19.99 h0.89
  text "PB7" at -4.745,19.812 h1.02
  text "GND" at 9.652,19.558 h1.02
  text "D7" at 51.689,18.085 h1.02
  text "PB1" at 65.227,17.475 h0.89
  text "PC13" at -4.745,17.272 h1.02
  text "VIN" at 9.652,17.018 h1.02
  text "PA8" at 51.664,16.815 h1.02
  text "NC" at 9.652,14.986 h1.02
  text "PC14" at -4.745,14.732 h1.02
  text "PB15" at 65.232,14.732 h1.02
  text "PWM/D6" at 45.364,14.503 h1.02
  text "PB10" at 51.105,14.173 h1.02
  text "PC15" at -4.745,12.192 h1.02
  text "PB14" at 65.232,12.192 h1.02
  text "PWM/D5" at 45.178,12.065 h1.02
  text "PB4" at 51.493,12.065 h1.02
  text "PA0" at 9.652,11.151 h1.02
  text "A0" at 13.005,11.125 h1.02
  text "A1" at 13.081,9.703 h1.02
  text "PF0" at -4.745,9.652 h1.02
  text "PA1" at 9.652,9.652 h1.02
  text "PB13" at 65.232,9.652 h1.02
  text "D4" at 49.014,9.525 h1.02
  text "PB5" at 51.541,9.525 h1.02
  text "A2" at 12.852,7.417 h1.02
  text "PA4" at 9.652,7.366 h1.02
  text "PF1" at -4.745,7.112 h1.02
  text "PB13" at 65.232,7.112 h1.02
  text "PWM/D3" at 45.178,6.985 h1.02
  text "PB3" at 51.541,6.985 h1.02
  text "A3" at 12.852,4.623 h1.02
  text "3V3" at -4.745,4.572 h1.02
  text "PB0" at 9.652,4.572 h1.02
  text "PC4" at 65.232,4.572 h1.02
  text "D2" at 48.819,4.496 h1.02
  text "PA10" at 50.69,4.445 h1.02
  text "A4" at 12.852,2.083 h1.02
  text "PC2" at -4.745,2.032 h1.02
  text "PC1" at 9.606,2.032 h1.02
  text "PF5" at 65.232,2.032 h1.02
  text "TX/D1" at 47.473,1.981 h1.02
  text "PA2" at 51.587,1.981 h1.02
  text "A5" at 12.852,-0.33 h1.02
  text "PC3" at -4.745,-0.508 h1.02
  text "PC0" at 9.606,-0.508 h1.02
  text "PF4" at 65.232,-0.508 h1.02
  text "RX/D0" at 45.872,-0.635 h0.89
  text "PA3" at 51.664,-0.635 h1.02
  text "QQ群 :124545085" at 28.956,-5.588 h3.05
  text "NUCLEO-DG" at 15.748,-5.842 h1.5
  text "rev C" at 15.748,-7.874 h1.5
  text "锝臻科技" at 29.083,-8.255 h3.05
  text "74.214 (mm)" at 24.511,-12.7 h1.52